# Altium PCB COMMS_TEMP.PcbDoc
Units mil, origin at the board's own origin, x right, y up, seen from the top; angles counter-clockwise.
Board outline 11330 x 5435 mil, 2 copper layers (Top Layer, Bottom Layer); 84 components, 583 nets, 842 pads, 82 vias.
Unrouted connection lines stored in the file: 232.
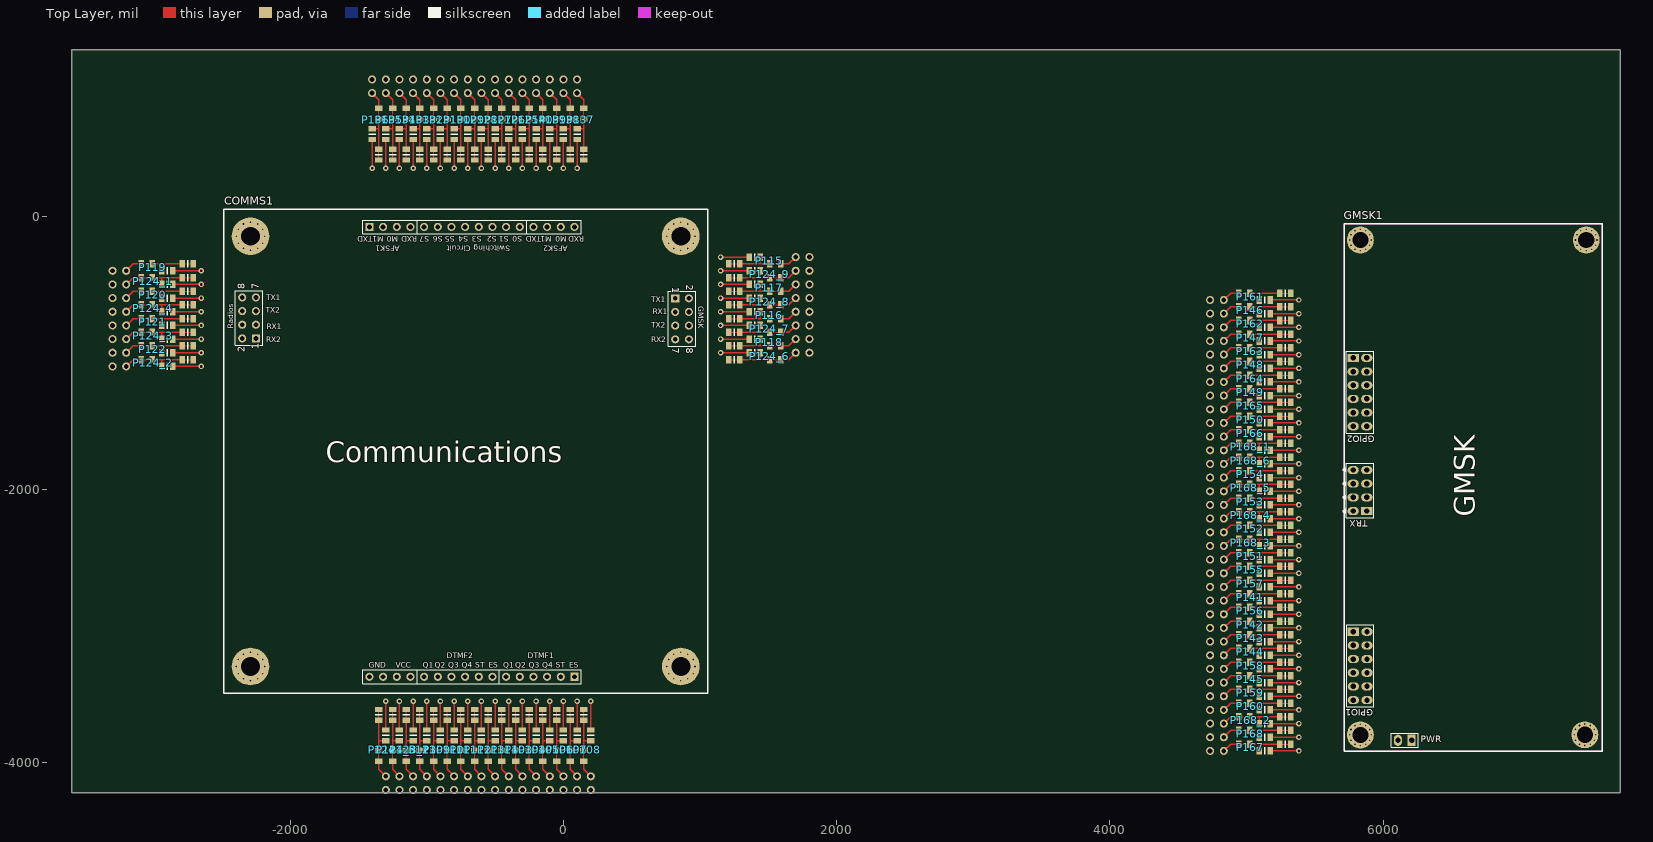
[diagram p0: Top Layer view]
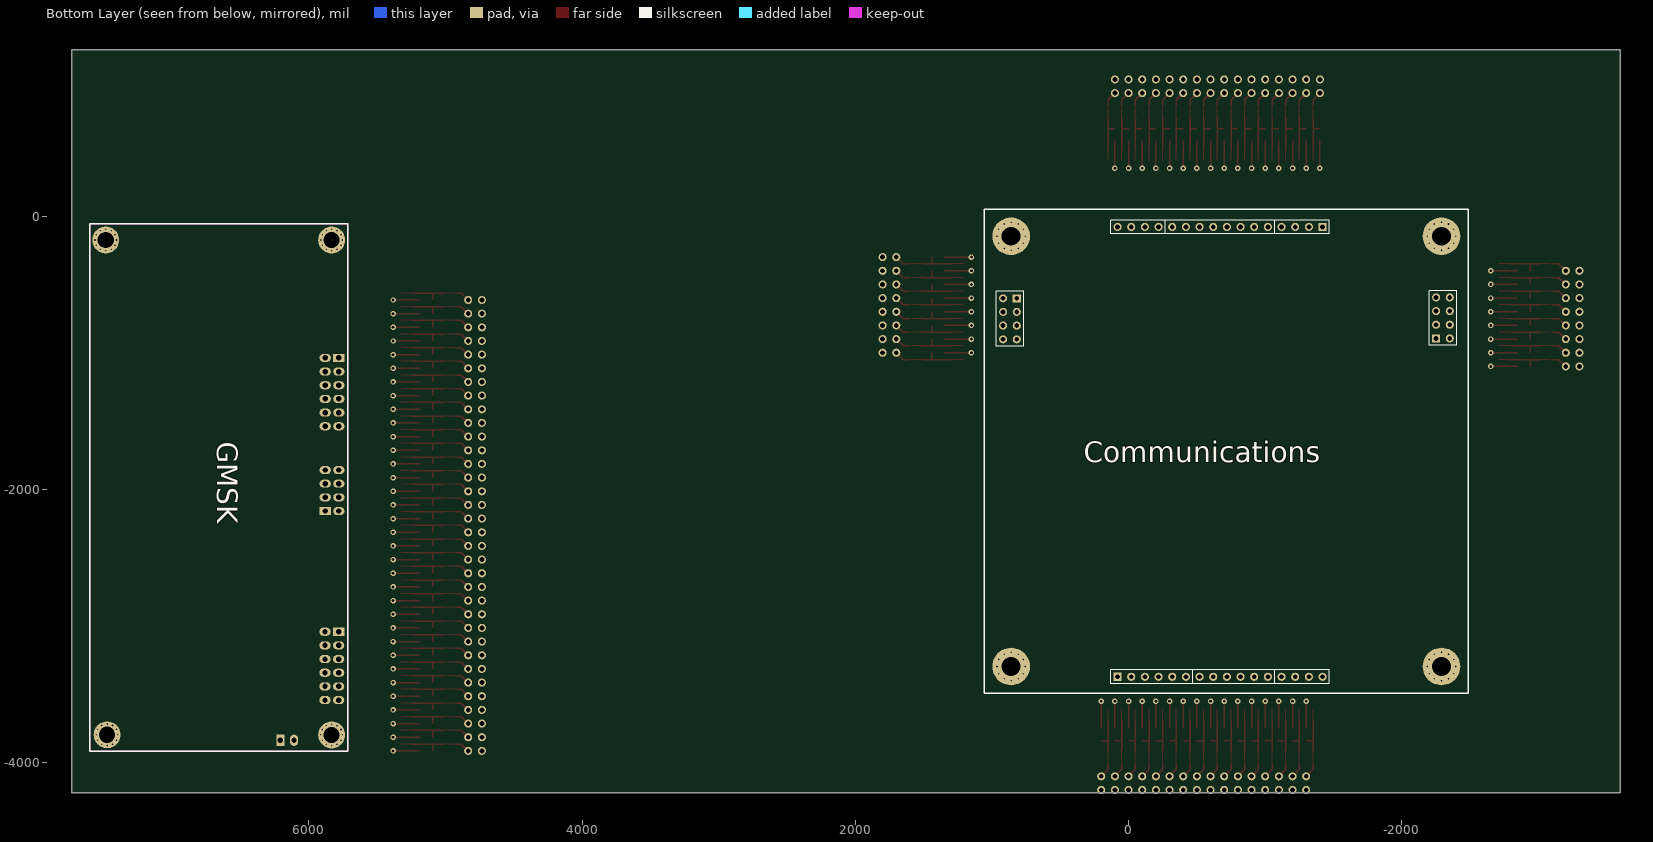
[diagram p1: Bottom Layer view, seen from below]

## Layer stack, top to bottom
Top Layer: signal copper 1.4
Dielectric: dielectric 12.6, FR-4, Dk 4.8
Bottom Layer: signal copper 1.4

## Board outline
-3597,-4219 7733,-4219 7733,1211 7733,1216 -3597,1216

## Design rules (kind name [scope] priority, off if disabled: settings)
Clearance [All] p1: gap=10
PolygonConnect [All] p1: connectstyle=Relief reliefconductorwidth=10 reliefentries=4 polygonreliefangle="90 Angle"
RoutingVias [All] p1: holewidth=28 width=50 viastyle="Through Hole" minholewidth=28 minwidth=50 maxholewidth=28 maxwidth=50
SilkscreenOverComponentPads [All] p1: minsilkscreentomaskgap=10
SolderMaskExpansion [All] p1: expansion=4
Width [All] p1: maxlimit=10 minlimit=10 preferedwidth=10
27 further rules are at their usual default settings.

## Classes and differential pairs
component class PWR_GEN: BCR1 D1 F86 F87 F88 F89 F90 F91 F92 F93 F94 F95 F96 F97 F98 F99 F100 F101 F102 F103 F104 F105 P321 P322 P323 P324 P325 P326 P327 P328 P329 P330 P331 P332 P333 P334 P335 P336 P337 P338 P339 P340 P341 P342 P343 P344 P345 P346 P347 P348 P349 P350 P351 P352 P353 P354 P355
component class CONNECTORS: F49 F50 F51 F52 F53 F54 F55 F56 F57 F58 F59 F60 F61 F62 J1 J2 J3 J4 J5 J6 J7 J8 J9 J10 J11 J12 J13 J14 J15 J16 J17 J18 J19 J20 J21 J22 J23 J24 P169 P170 P171 P172 P173 P174 P175 P176 P177 P178 P179 P180 P181 P182 P183 P184 P185 P186
component class COMMSB: COMMS1 P103 P104 P105 P106 P107 P108 P109 P110 P111 P112 P113 P114 P115 P116 P117 P118 P119 P120 P121 P122 P123 P123_1 P124 P124_1 P124_2 P124_3 P124_4 P124_5 P124_6 P124_7 P124_8 P124_9 P125 P126 P127 P128 P129 P130 P131 P132 P133 P134 P135 P136 P137 P138 P139 P140
component class GMSK: GMSK1 P141 P142 P143 P144 P145 P146 P147 P148 P149 P150 P151 P152 P153 P154 P155 P156 P157 P158 P159 P160 P161 P162 P163 P164 P165 P166 P167 P168 P168_1 P168_2 P168_3 P168_4 P168_5 P168_6

## Components (designator, comment, footprint, x,y, rotation, side; value= is the part's Value field where it differs from the comment)
COMMS1 "COMMS" Communications -2487,-3494 r0 top
GMSK1 "GMSK" GMSK 7633,-3914 r90 top
P103 "Jumper_Filter" Jumper_filter -300,-4200 r90 top
P104 "Jumper_Filter" Jumper_filter -200,-4200 r90 top
P105 "Jumper_Filter" Jumper_filter -100,-4200 r90 top
P106 "Jumper_Filter" Jumper_filter 0,-4200 r90 top
P107 "Jumper_Filter" Jumper_filter 100,-4200 r90 top
P108 "Jumper_Filter" Jumper_filter 200,-4200 r90 top
P109 "Jumper_Filter" Jumper_filter -900,-4200 r90 top
P110 "Jumper_Filter" Jumper_filter -800,-4200 r90 top
P111 "Jumper_Filter" Jumper_filter -700,-4200 r90 top
P112 "Jumper_Filter" Jumper_filter -600,-4200 r90 top
P113 "Jumper_Filter" Jumper_filter -500,-4200 r90 top
P114 "Jumper_Filter" Jumper_filter -400,-4200 r90 top
P115 "Jumper_Filter" Jumper_filter 1800,-300 r180 top
P116 "Jumper_Filter" Jumper_filter 1800,-700 r180 top
P117 "Jumper_Filter" Jumper_filter 1800,-500 r180 top
P118 "Jumper_Filter" Jumper_filter 1800,-900 r180 top
P119 "Jumper_Filter" Jumper_filter -3300,-400 r0 top
P120 "Jumper_Filter" Jumper_filter -3300,-600 r0 top
P121 "Jumper_Filter" Jumper_filter -3300,-800 r0 top
P122 "Jumper_Filter" Jumper_filter -3300,-1000 r0 top
P123 "Jumper_Filter" Jumper_filter -1000,-4200 r90 top
P123_1 "Jumper_Filter" Jumper_filter -1100,-4200 r90 top
P124 "Jumper_Filter" Jumper_filter -1300,-4200 r90 top
P124_1 "Jumper_Filter" Jumper_filter -3300,-500 r0 top
P124_2 "Jumper_Filter" Jumper_filter -3300,-1100 r0 top
P124_3 "Jumper_Filter" Jumper_filter -3300,-900 r0 top
P124_4 "Jumper_Filter" Jumper_filter -3300,-700 r0 top
P124_5 "Jumper_Filter" Jumper_filter -1200,-4200 r90 top
P124_6 "Jumper_Filter" Jumper_filter 1800,-1000 r180 top
P124_7 "Jumper_Filter" Jumper_filter 1800,-800 r180 top
P124_8 "Jumper_Filter" Jumper_filter 1800,-600 r180 top
P124_9 "Jumper_Filter" Jumper_filter 1800,-400 r180 top
P125 "Jumper_Filter" Jumper_filter -300,1000 r270 top
P126 "Jumper_Filter" Jumper_filter -400,1000 r270 top
P127 "Jumper_Filter" Jumper_filter -500,1000 r270 top
P128 "Jumper_Filter" Jumper_filter -600,1000 r270 top
P129 "Jumper_Filter" Jumper_filter -700,1000 r270 top
P130 "Jumper_Filter" Jumper_filter -800,1000 r270 top
P131 "Jumper_Filter" Jumper_filter -900,1000 r270 top
P132 "Jumper_Filter" Jumper_filter -1000,1000 r270 top
P133 "Jumper_Filter" Jumper_filter -1100,1000 r270 top
P134 "Jumper_Filter" Jumper_filter -1200,1000 r270 top
P135 "Jumper_Filter" Jumper_filter -1300,1000 r270 top
P136 "Jumper_Filter" Jumper_filter -1400,1000 r270 top
P137 "Jumper_Filter" Jumper_filter 100,1000 r270 top
P138 "Jumper_Filter" Jumper_filter 0,1000 r270 top
P139 "Jumper_Filter" Jumper_filter -100,1000 r270 top
P140 "Jumper_Filter" Jumper_filter -200,1000 r270 top
P141 "Jumper_Filter" Jumper_filter 4733,-2814 r0 top
P142 "Jumper_Filter" Jumper_filter 4733,-3014 r0 top
P143 "Jumper_Filter" Jumper_filter 4733,-3114 r0 top
P144 "Jumper_Filter" Jumper_filter 4733,-3214 r0 top
P145 "Jumper_Filter" Jumper_filter 4733,-3414 r0 top
P146 "Jumper_Filter" Jumper_filter 4733,-714 r0 top
P147 "Jumper_Filter" Jumper_filter 4733,-914 r0 top
P148 "Jumper_Filter" Jumper_filter 4733,-1114 r0 top
P149 "Jumper_Filter" Jumper_filter 4733,-1314 r0 top
P150 "Jumper_Filter" Jumper_filter 4733,-1514 r0 top
P151 "Jumper_Filter" Jumper_filter 4733,-2514 r0 top
P152 "Jumper_Filter" Jumper_filter 4733,-2314 r0 top
P153 "Jumper_Filter" Jumper_filter 4733,-2114 r0 top
P154 "Jumper_Filter" Jumper_filter 4733,-1914 r0 top
P155 "Jumper_Filter" Jumper_filter 4733,-2614 r0 top
P156 "Jumper_Filter" Jumper_filter 4733,-2914 r0 top
P157 "Jumper_Filter" Jumper_filter 4733,-2714 r0 top
P158 "Jumper_Filter" Jumper_filter 4733,-3314 r0 top
P159 "Jumper_Filter" Jumper_filter 4733,-3514 r0 top
P160 "Jumper_Filter" Jumper_filter 4733,-3614 r0 top
P161 "Jumper_Filter" Jumper_filter 4733,-614 r0 top
P162 "Jumper_Filter" Jumper_filter 4733,-814 r0 top
P163 "Jumper_Filter" Jumper_filter 4733,-1014 r0 top
P164 "Jumper_Filter" Jumper_filter 4733,-1214 r0 top
P165 "Jumper_Filter" Jumper_filter 4733,-1414 r0 top
P166 "Jumper_Filter" Jumper_filter 4733,-1614 r0 top
P167 "Jumper_Filter" Jumper_filter 4733,-3914 r0 top
P168 "Jumper_Filter" Jumper_filter 4733,-3814 r0 top
P168_1 "Jumper_Filter" Jumper_filter 4733,-1714 r0 top
P168_2 "Jumper_Filter" Jumper_filter 4733,-3714 r0 top
P168_3 "Jumper_Filter" Jumper_filter 4733,-2414 r0 top
P168_4 "Jumper_Filter" Jumper_filter 4733,-2214 r0 top
P168_5 "Jumper_Filter" Jumper_filter 4733,-2014 r0 top
P168_6 "Jumper_Filter" Jumper_filter 4733,-1814 r0 top

## Footprints (in the part's own frame and the unit in brackets; to place one, negate y for a bottom-side part, rotate by r counter-clockwise, add the part's x,y. Pads: shape width x height; smd on the part's side, far side on the other; paste and mask are expansions set on the pad)
Communications [mm] "Communications"
  round 1.5 hole 0.9: AFSK1_M0(32.192,86.733) AFSK1_M1(29.652,86.733) AFSK1_RXD(34.732,86.733) AFSK2_M0(62.672,86.733) AFSK2_M1(60.132,86.733) AFSK2_RXD(65.212,86.733) AFSK2_TXD(57.592,86.733) DTMF1_Q1(52.512,3.113) DTMF1_Q2(55.052,3.113) DTMF1_Q3(57.592,3.113) DTMF1_Q4(60.132,3.113) DTMF1_ST(62.672,3.113) DTMF2_ES(49.972,3.113) DTMF2_Q1(37.272,3.113) DTMF2_Q2(39.812,3.113) DTMF2_Q3(42.352,3.113) DTMF2_Q4(44.892,3.113) DTMF2_ST(47.432,3.113) GMSK_RX1(83.952,70.923) GMSK_RX2(83.952,65.843) GMSK_TX2(83.952,68.383) GND(3.462,66.013) GND(3.462,68.553) GND(3.462,71.093) GND(3.462,73.633) GND(27.112,3.113) GND(29.652,3.113) GND(86.492,65.843) GND(86.492,68.383) GND(86.492,70.923) GND(86.492,73.463) RX1(6.002,68.553) S0(55.052,86.733) S1(52.512,86.733) S2(49.972,86.733) S3(47.432,86.733) S4(44.892,86.733) S5(42.352,86.733) S6(39.812,86.733) S7(37.272,86.733) TX1(6.002,73.633) TX2(6.002,71.093) VCC(32.192,3.113) VCC(34.732,3.113)
  rect 1.5x1.5 hole 0.9: AFSK1_TXD(27.112,86.733) DTMF1_ES(65.212,3.113) GMSK_TX1(83.952,73.463) RX2(6.002,66.013)
  round 1 hole 0.3: ""(2.377,5.013) ""(2.377,85.013) ""(2.729,3.701) ""(2.729,6.325) ""(2.729,83.701) ""(2.729,86.325) ""(3.69,7.286) ""(3.69,87.286) ""(3.69,2.74) ""(3.69,82.74) ""(5.002,2.388) ""(5.002,7.638) ""(5.002,82.388) ""(5.002,87.638) ""(6.314,2.74) ""(6.314,7.286) ""(6.314,82.74) ""(6.314,87.286) ""(7.275,3.701) ""(7.275,83.701) ""(7.275,6.325) ""(7.275,86.325) ""(7.627,5.013) ""(7.627,85.013) ""(82.375,85) ""(82.377,5.013) ""(82.727,83.688) ""(82.727,86.312) ""(82.729,3.701) ""(82.729,6.325) ""(83.688,87.273) ""(83.688,82.727) ""(83.69,7.286) ""(83.69,2.74) ""(85,82.375) ""(85,87.625) ""(85.002,2.388) ""(85.002,7.638) ""(86.312,82.727) ""(86.312,87.273) ""(86.314,2.74) ""(86.314,7.286) ""(87.273,83.688) ""(87.273,86.312) ""(87.275,3.701) ""(87.275,6.325) ""(87.625,85) ""(87.627,5.013)
  round 7 hole 3.5: ""(5.002,5.013) ""(5.002,85.013) ""(85,85) ""(85.002,5.013)
  silkscreen extent 0,0.01 90,90.01
GMSK [mm] "Foot print of GMSK for the flatsat board"
  rect 1.5x2.1 hole 1: 1A(22.15,47.03) 1B(73.05,47.08) 1C(44.59,44.54)
  oval 1.5x2.1 hole 1: 2A(22.15,44.49) 2B(73.05,44.54) 3A(19.61,47.03) 3B(70.51,47.08) 3C(47.13,44.54) 4A(19.61,44.49) 4B(70.51,44.54) 5A(17.07,47.03) 5B(67.97,47.08) 5C(49.67,44.54) 6A(17.07,44.49) 6B(67.97,44.54) 7A(14.53,47.03) 7B(65.43,47.08) 7C(52.21,44.54) 8A(14.53,44.49) 8B(65.43,44.54) 8C(9.45,47.03) 8C(44.59,47.08) 8C(47.13,47.08) 8C(49.67,47.08) 8C(52.21,47.08) 8C(60.35,47.08) 9A(11.99,47.03) 9B(62.89,47.08) 10A(11.99,44.49) 10B(62.89,44.54) 12A(9.45,44.49) 12B(60.35,44.54)
  oval 2.1x1.5 hole 1: 2C(1.97,38.74)
  rect 2.1x1.5 hole 1: 8C(1.97,36.2)
  round 1 hole 0.3: ""(0.97,45.74) ""(1,4) ""(1.238,46.74) ""(1.238,44.74) ""(1.268,5) ""(1.268,3) ""(1.97,47.472) ""(1.97,44.008) ""(2,5.732) ""(2,2.268) ""(2.97,47.74) ""(2.97,43.74) ""(3,6) ""(3,2) ""(3.97,44.008) ""(3.97,47.472) ""(4,2.268) ""(4,5.732) ""(4.702,44.74) ""(4.702,46.74) ""(4.732,3) ""(4.732,5) ""(4.97,45.74) ""(5,4) ""(92.97,3.74) ""(92.97,45.74) ""(93.238,2.74) ""(93.238,4.74) ""(93.238,44.74) ""(93.238,46.74) ""(93.97,2.008) ""(93.97,5.472) ""(93.97,44.008) ""(93.97,47.472) ""(94.97,1.74) ""(94.97,5.74) ""(94.97,43.74) ""(94.97,47.74) ""(95.97,2.008) ""(95.97,5.472) ""(95.97,44.008) ""(95.97,47.472) ""(96.702,2.74) ""(96.702,4.74) ""(96.702,44.74) ""(96.702,46.74) ""(96.97,3.74) ""(96.97,45.74)
  round 5 hole 3: ""(2.97,45.74) ""(3,4) ""(94.97,3.74) ""(94.97,45.74)
  Keep-Out Layer lines w0.254: -0.03,48.74 97.97,48.74 97.97,0.74 -0.03,0.74 -0.03,48.74
  silkscreen extent -0.03,0.74 97.97,48.94, body extent 0.8,35.03 74.23,48.26, height 7.01
Jumper_filter [mm] "Connector; Header; 2 Position"
  round 1.5 hole 0.9: 1(0,0) 2(2.54,0)
  rect 1x1.4 smd: 2(5.35,1.27) 2(7.35,1.27) 2(9.16,0) 2(12.97,1.27) 2(14.97,1.27) 3(11.16,0)
  Top Layer lines w0.152: 5.334,1.27 14.986,1.27 ; 7.366,1.27 7.366,1.016
  Top Layer lines w0.254: 5.08,1.27 3.81,1.27 2.54,0 ; 7.366,1.27 12.954,1.27 ; 9.144,1.27 9.144,0 ; 11.43,0 16.51,0
  silkscreen extent 10.16,-0.65 13.97,1.92, body extent 5.25,-0.65 15.07,1.92, height 0.5

## Via types
v1: diameter 40, hole 20, Top Layer to Bottom Layer, 82 vias

## Nets (pads, with @x,y where several pads share a name; then routed paths per layer and width w, separated by ;. In a path a pad name is that pad's centre, name@x,y a point inside that pad or via, vN(x,y) a via of type N, cw(c..) or ccw(c..) an arc to the next point about the centre after c; other vN are vias at no path point)
3V3_AUX: 
3V3_AUX_E\N\: 
3V3_BBONE: 
3V3_COMMS: P123.1 P123_1.1 P167.1
3V3_CSC: 
3V3_PWR: 
3V3_UNREG: 
5V0_AUX: 
5V0_AUX_E\N\: 
5V0_BBONE: 
5V0_BCR: 
5V0_TELEM: 
5V0_UNREG: 
8V0_RX1: 
8V0_RX2: 
AFSK1_DET: P108.1
AFSK1_M0: P134.1
AFSK1_M1: P135.1
AFSK1_RX: 
AFSK1_RXD: P133.1
AFSK1_TX: 
AFSK1_TXD: P136.1
AFSK2_DET: P114.1
AFSK2_M0: P138.1
AFSK2_M1: P139.1
AFSK2_RX: 
AFSK2_RXD: P137.1
AFSK2_TX: 
AFSK2_TXD: P140.1
BBONE_E\N\: 
BBONE_I2C2_SCL: 
BBONE_I2C2_SDA: 
BCR_E\N\: 
BCR_MISO: 
BCR_MOSI: 
BCR_R\S\T\: 
BCR_SCK: 
COMMS_E\N\: 
CSC_E\N\: 
CSC_ISP: 
CSC_RST: 
DTMF1Q1: P103.1
DTMF1Q2: P104.1
DTMF1Q3: P105.1
DTMF1Q4: P106.1
DTMF1ST: P107.1
DTMF2Q1: P109.1
DTMF2Q2: P110.1
DTMF2Q3: P111.1
DTMF2Q4: P112.1
DTMF2ST: P113.1
GND: P103.3 P104.3 P105.3 P106.3 P107.3 P108.3 P109.3 P110.3 P111.3 P112.3 P113.3 P114.3 P115.3 P116.3 P117.3 P118.3 P119.3 P120.3 P121.3 P122.3 P123.3 P123_1.3 P124.1 P124.3 P124_1.1 P124_1.3 P124_2.1 P124_2.3 P124_3.1 P124_3.3 P124_4.1 P124_4.3 P124_5.1 P124_5.3 P124_6.1 P124_6.3 P124_7.1 P124_7.3 P124_8.1 P124_8.3 P124_9.1 P124_9.3 P125.3 P126.3 P127.3 P128.3 P129.3 P130.3 P131.3 P132.3 P133.3 P134.3 P135.3 P136.3 P137.3 P138.3 P139.3 P140.3 P141.3 P142.3 P143.3 P144.3 P145.3 P146.3 P147.3 P148.3 P149.3 P150.3 P151.3 P152.3 P153.3 P154.3 P155.3 P156.3 P157.3 P158.3 P159.3 P160.3 P161.3 P162.3 P163.3 P164.3 P165.3 P166.3 P167.3 P168.1 P168.3 P168_1.1 P168_1.3 P168_2.1 P168_2.3 P168_3.1 P168_3.3 P168_4.1 P168_4.3 P168_5.1 P168_5.3 P168_6.1 P168_6.3
  other v1: 5383,-3914 5383,-3814 5383,-3714 5383,-3614 -1300,-3550 -1200,-3550 -1100,-3550 -1000,-3550 -900,-3550 -800,-3550 -700,-3550 -600,-3550 -500,-3550 -400,-3550 -300,-3550 -200,-3550 -100,-3550 0,-3550 100,-3550 200,-3550 5383,-3514 5383,-3414 5383,-3314 5383,-2914 5383,-2714 5383,-2614 5383,-2514 5383,-2414 5383,-2314 5383,-2214 5383,-2114 5383,-2014 5383,-1914 5383,-1814 5383,-1714 5383,-1614 5383,-1414 5383,-1214 -2650,-1100 5383,-1014 -2650,-1000 1150,-1000 5383,-914 -2650,-900 1150,-900 5383,-814 -2650,-800 1150,-800 5383,-714 -2650,-700 1150,-700 5383,-614 -2650,-600 1150,-600 -2650,-500 1150,-500 -2650,-400 1150,-400 1150,-300 -1400,350 -1300,350 -1200,350 -1100,350 -1000,350 -900,350 -800,350 -700,350 -600,350 -500,350 -400,350 -300,350 -200,350 -100,350 0,350 100,350
I2C0_SCL: 
I2C0_SDA: 
I2C1_SCL: 
I2C1_SDA: 
I2C2_SCL: 
I2C2_SCL_5V: 
I2C2_SDA: 
I2C2_SDA_5V: 
NetBBONE1_A01: 
NetBBONE1_A02: 
NetBBONE1_A03: 
NetBBONE1_A04: 
NetBBONE1_A05: 
NetBBONE1_A06: 
NetBBONE1_A07: 
NetBBONE1_A08: 
NetBBONE1_A09: 
NetBBONE1_A10: 
NetBBONE1_A11: 
NetBBONE1_A12: 
NetBBONE1_A13: 
NetBBONE1_A14: 
NetBBONE1_A15: 
NetBBONE1_A16: 
NetBBONE1_A17: 
NetBBONE1_A18: 
NetBBONE1_A19: 
NetBBONE1_A20: 
NetBBONE1_A21: 
NetBBONE1_A22: 
NetBBONE1_A23: 
NetBBONE1_A24: 
NetBBONE1_A25: 
NetBBONE1_A26: 
NetBBONE1_A27: 
NetBBONE1_A28: 
NetBBONE1_A29: 
NetBBONE1_A30: 
NetBBONE1_A31: 
NetBBONE1_A32: 
NetBBONE1_A33: 
NetBBONE1_A34: 
NetBBONE1_A35: 
NetBBONE1_A36: 
NetBBONE1_A37: 
NetBBONE1_A38: 
NetBBONE1_A39: 
NetBBONE1_A40: 
NetBBONE1_A41: 
NetBBONE1_A42: 
NetBBONE1_A43: 
NetBBONE1_A44: 
NetBBONE1_A45: 
NetBBONE1_A46: 
NetBBONE1_B01: 
NetBBONE1_B02: 
NetBBONE1_B03: 
NetBBONE1_B04: 
NetBBONE1_B05: 
NetBBONE1_B06: 
NetBBONE1_B07: 
NetBBONE1_B08: 
NetBBONE1_B09: 
NetBBONE1_B10: 
NetBBONE1_B11: 
NetBBONE1_B12: 
NetBBONE1_B13: 
NetBBONE1_B14: 
NetBBONE1_B15: 
NetBBONE1_B16: 
NetBBONE1_B17: 
NetBBONE1_B18: 
NetBBONE1_B19: 
NetBBONE1_B20: 
NetBBONE1_B21: 
NetBBONE1_B22: 
NetBBONE1_B23: 
NetBBONE1_B24: 
NetBBONE1_B25: 
NetBBONE1_B26: 
NetBBONE1_B27: 
NetBBONE1_B28: 
NetBBONE1_B29: 
NetBBONE1_B30: 
NetBBONE1_B31: 
NetBBONE1_B32: 
NetBBONE1_B33: 
NetBBONE1_B34: 
NetBBONE1_B35: 
NetBBONE1_B36: 
NetBBONE1_B37: 
NetBBONE1_B38: 
NetBBONE1_B39: 
NetBBONE1_B40: 
NetBBONE1_B41: 
NetBBONE1_B42: 
NetBBONE1_B43: 
NetBBONE1_B44: 
NetBBONE1_B45: 
NetBBONE1_B46: 
NetBBONE1_P01: 
NetBBONE1_P02: 
NetBBONE1_P03: 
NetBBONE1_P04: 
NetBBONE1_P05: 
NetBBONE1_P06: 
NetBBONE1_P07: 
NetBBONE1_P08: 
NetBBONE1_P09: 
NetBBONE1_P10: 
NetBCR1_1: 
NetBCR1_2: 
NetBCR1_3: 
NetBCR1_4: 
NetBCR1_5: 
NetBCR1_6: 
NetBCR1_7: 
NetBCR1_8: 
NetBCR1_9: 
NetBCR1_10: 
NetBCR1_11: 
NetBCR1_12: 
NetBCR1_13: 
NetBCR1_14: 
NetBCR1_15: 
NetBCR1_16: 
NetBCR1_17: 
NetBCR1_18: 
NetBCR1_19: 
NetBCR1_20: 
NetBCR1_21: 
NetBCR1_22: 
NetBCR1_23: 
NetBCR1_24: 
NetBCR1_25: 
NetBCR1_26: 
NetBCR1_27: 
NetBCR1_28: 
NetBCR1_29: 
NetBCR1_30: 
NetBCR1_31: 
NetBCR1_32: 
NetBCR1_33: 
NetBCR1_34: 
NetBCR1_35: 
NetC1_2: 
NetCOMMS1_AFSK1_M0: COMMS1.AFSK1_M0 P134.2
NetCOMMS1_AFSK1_M1: COMMS1.AFSK1_M1 P135.2
NetCOMMS1_AFSK1_RXD: COMMS1.AFSK1_RXD P133.2
NetCOMMS1_AFSK1_TXD: COMMS1.AFSK1_TXD P136.2
NetCOMMS1_AFSK2_M0: COMMS1.AFSK2_M0 P138.2
NetCOMMS1_AFSK2_M1: COMMS1.AFSK2_M1 P139.2
NetCOMMS1_AFSK2_RXD: COMMS1.AFSK2_RXD P137.2
NetCOMMS1_AFSK2_TXD: COMMS1.AFSK2_TXD P140.2
NetCOMMS1_DTMF1_ES: COMMS1.DTMF1_ES P108.2
NetCOMMS1_DTMF1_Q1: COMMS1.DTMF1_Q1 P103.2
NetCOMMS1_DTMF1_Q2: COMMS1.DTMF1_Q2 P104.2
NetCOMMS1_DTMF1_Q3: COMMS1.DTMF1_Q3 P105.2
NetCOMMS1_DTMF1_Q4: COMMS1.DTMF1_Q4 P106.2
NetCOMMS1_DTMF1_ST: COMMS1.DTMF1_ST P107.2
NetCOMMS1_DTMF2_ES: COMMS1.DTMF2_ES P114.2
NetCOMMS1_DTMF2_Q1: COMMS1.DTMF2_Q1 P109.2
NetCOMMS1_DTMF2_Q2: COMMS1.DTMF2_Q2 P110.2
NetCOMMS1_DTMF2_Q3: COMMS1.DTMF2_Q3 P111.2
NetCOMMS1_DTMF2_Q4: COMMS1.DTMF2_Q4 P112.2
NetCOMMS1_DTMF2_ST: COMMS1.DTMF2_ST P113.2
NetCOMMS1_GMSK_RX1: COMMS1.GMSK_RX1 P117.2
NetCOMMS1_GMSK_RX2: COMMS1.GMSK_RX2 P118.2
NetCOMMS1_GMSK_TX1: COMMS1.GMSK_TX1 P115.2
NetCOMMS1_GMSK_TX2: COMMS1.GMSK_TX2 P116.2
NetCOMMS1_GND: COMMS1.GND P124.2 P124_1.2 P124_2.2 P124_3.2 P124_4.2 P124_5.2 P124_6.2 P124_7.2 P124_8.2 P124_9.2
NetCOMMS1_RX1: COMMS1.RX1 P121.2
NetCOMMS1_RX2: COMMS1.RX2 P122.2
NetCOMMS1_S0: COMMS1.S0 P125.2
NetCOMMS1_S1: COMMS1.S1 P126.2
NetCOMMS1_S2: COMMS1.S2 P127.2
NetCOMMS1_S3: COMMS1.S3 P128.2
NetCOMMS1_S4: COMMS1.S4 P129.2
NetCOMMS1_S5: COMMS1.S5 P130.2
NetCOMMS1_S6: COMMS1.S6 P131.2
NetCOMMS1_S7: COMMS1.S7 P132.2
NetCOMMS1_TX1: COMMS1.TX1 P119.2
NetCOMMS1_TX2: COMMS1.TX2 P120.2
NetCOMMS1_VCC: COMMS1.VCC P123.2@-1000,-4100 P123_1.2
NetCSC1_C1_1: 
NetCSC1_C1_2: 
NetCSC1_C1_3: 
NetCSC1_C1_4: 
NetCSC1_C1_5: 
NetCSC1_C1_6: 
NetCSC1_C1_7: 
NetCSC1_C1_8: 
NetCSC1_C1_9: 
NetCSC1_C1_10: 
NetCSC1_C1_11: 
NetCSC1_C1_12: 
NetCSC1_C1_13: 
NetCSC1_C1_14: 
NetCSC1_C1_15: 
NetCSC1_C1_16: 
NetCSC1_C1_17: 
NetCSC1_C1_18: 
NetCSC1_C1_19: 
NetCSC1_C1_20: 
NetCSC1_C1_21: 
NetCSC1_C1_22: 
NetCSC1_C1_23: 
NetCSC1_C1_24: 
NetCSC1_C1_25: 
NetCSC1_C1_26: 
NetCSC1_C1_27: 
NetCSC1_C1_28: 
NetCSC1_C1_29: 
NetCSC1_C1_30: 
NetCSC1_C1_31: 
NetCSC1_C1_32: 
NetCSC1_C1_33: 
NetCSC1_C1_34: 
NetCSC1_C1_35: 
NetCSC1_C1_36: 
NetCSC1_C1_37: 
NetCSC1_C1_38: 
NetCSC1_C1_39: 
NetCSC1_C2_2: 
NetCSC1_C2_3: 
NetCSC1_C2_4: 
NetCSC1_C2_5: 
NetCSC1_C2_6: 
NetCSC1_C2_7: 
NetCSC1_C2_8: 
NetCSC1_C2_9: 
NetCSC1_C2_10: 
NetCSC1_C2_11: 
NetCSC1_C2_12: 
NetCSC1_C2_13: 
NetCSC1_C2_14: 
NetCSC1_C2_15: 
NetCSC1_C2_16: 
NetCSC1_C2_17: 
NetCSC1_C2_18: 
NetCSC1_C2_19: 
NetCSC1_C2_20: 
NetCSC1_C2_21: 
NetCSC1_C2_22: 
NetCSC1_C2_23: 
NetCSC1_C2_24: 
NetCSC1_C2_25: 
NetCSC1_C2_26: 
NetCSC1_C2_27: 
NetCSC1_C2_28: 
NetCSC1_C2_29: 
NetCSC1_C2_30: 
NetCSC1_C2_31: 
NetCSC1_C2_32: 
NetCSC1_C2_33: 
NetCSC1_C2_34: 
NetCSC1_C2_35: 
NetCSC1_C2_36: 
NetCSC1_C2_37: 
NetCSC1_C2_38: 
NetCSC1_C2_39: 
NetCSC1_C2_40: 
NetCSC1_C3_1: 
NetCSC1_C3_2: 
NetCSC1_C3_3: 
NetCSC1_C3_4: 
NetCSC1_C3_5: 
NetCSC1_C3_6: 
NetCSC1_C3_7: 
NetCSC1_C3_8: 
NetCSC1_C3_9: 
NetCSC1_C3_10: 
NetCSC1_C3_11: 
NetCSC1_C3_12: 
NetCSC1_C3_13: 
NetCSC1_C3_14: 
NetCSC1_C3_15: 
NetCSC1_C3_16: 
NetCSC1_C3_17: 
NetCSC1_C3_18: 
NetCSC1_C3_19: 
NetCSC1_C3_20: 
NetCSC1_C3_21: 
NetCSC1_C3_22: 
NetCSC1_C3_23: 
NetCSC1_C3_24: 
NetCSC1_C3_25: 
NetCSC1_C3_26: 
NetCSC1_C3_27: 
NetCSC1_C3_28: 
NetCSC1_C3_29: 
NetCSC1_C3_30: 
NetCSC1_C3_31: 
NetCSC1_C3_32: 
NetCSC1_C3_33: 
NetCSC1_C3_34: 
NetCSC1_C3_35: 
NetCSC1_C3_36: 
NetCSC1_C3_37: 
NetCSC1_C3_38: 
NetCSC1_C3_39: 
NetCSC1_C3_40: 
NetCSC1_ISP1: 
NetCSC1_ISP2: 
NetCSC1_ISP3: 
NetCSC1_ISP4: 
NetCSC1_ISP5: 
NetCSC1_ISP6: 
NetD1_1: 
NetF50_2: 
NetF51_2: 
NetF52_2: 
NetF53_2: 
NetF54_2: 
NetF55_2: 
NetF56_2: 
NetF57_2: 
NetF58_2: 
NetF59_1: 
NetF60_1: 
NetF61_2: 
NetF62_2: 
NetF86_1: 
NetF87_1: 
NetF88_1: 
NetF89_1: 
NetF91_1: 
NetF92_1: 
NetF93_1: 
NetF94_1: 
NetF95_1: 
NetF96_1: 
NetF97_1: 
NetF98_1: 
NetF99_2: 
NetF100_1: 
NetF101_1: 
NetF102_1: 
NetF103_1: 
NetF104_1: 
NetF105_1: 
NetF106_1: 
NetF106_2: 
NetF107_1: 
NetF107_2: 
NetF108_1: 
NetF108_2: 
NetF109_1: 
NetF109_2: 
NetF110_1: 
NetF110_2: 
NetF111_1: 
NetF111_2: 
NetF112_1: 
NetF112_2: 
NetF113_1: 
NetF113_2: 
NetF114_1: 
NetF114_2: 
NetF115_1: 
NetF115_2: 
NetF116_1: 
NetF116_2: 
NetF117_1: 
NetF117_2: 
NetF118_1: 
NetF118_2: 
NetF119_1: 
NetF119_2: 
NetF120_1: 
NetF120_2: 
NetF121_1: 
NetF121_2: 
NetF122_1: 
NetF122_2: 
NetF123_1: 
NetF123_2: 
NetF124_1: 
NetF124_2: 
NetF125_1: 
NetF125_2: 
NetF126_1: 
NetF126_2: 
NetF127_1: 
NetF127_2: 
NetGMSK1_1A: GMSK1.1A P141.2
NetGMSK1_1B: GMSK1.1B P146.2
NetGMSK1_1C: GMSK1.1C P151.2@4833,-2514
NetGMSK1_2A: GMSK1.2A P155.2
NetGMSK1_2B: GMSK1.2B P161.2
NetGMSK1_2C: GMSK1.2C P167.2
NetGMSK1_3A: GMSK1.3A P142.2@4833,-3014
NetGMSK1_3B: GMSK1.3B P147.2@4833,-914
NetGMSK1_3C: GMSK1.3C P152.2
NetGMSK1_4A: GMSK1.4A P156.2
NetGMSK1_4B: GMSK1.4B P162.2
NetGMSK1_5A: GMSK1.5A P143.2
NetGMSK1_5B: GMSK1.5B P148.2
NetGMSK1_5C: GMSK1.5C P153.2@4833,-2114
NetGMSK1_6A: GMSK1.6A P157.2
NetGMSK1_6B: GMSK1.6B P163.2
NetGMSK1_7A: GMSK1.7A P144.2
NetGMSK1_7B: GMSK1.7B P149.2
NetGMSK1_7C: GMSK1.7C P154.2
NetGMSK1_8A: GMSK1.8A P158.2
NetGMSK1_8B: GMSK1.8B P164.2
NetGMSK1_8C: GMSK1.8C P168.2 P168_1.2 P168_2.2 P168_3.2 P168_4.2 P168_5.2 P168_6.2
NetGMSK1_9A: GMSK1.9A P145.2
NetGMSK1_9B: GMSK1.9B P150.2
NetGMSK1_10A: GMSK1.10A P159.2
NetGMSK1_10B: GMSK1.10B P165.2
NetGMSK1_12A: GMSK1.12A P160.2
NetGMSK1_12B: GMSK1.12B P166.2
NetJ15_1: 
NetJ15_2: 
NetJ15_3: 
NetJ15_4: 
NetJ15_5: 
NetJ15_6: 
NetJ15_7: 
NetJ15_8: 
NetJ15_9: 
NetJ16_1: 
NetJ16_2: 
NetJ16_3: 
NetJ16_4: 
NetJ16_5: 
NetJ16_6: 
NetJ16_7: 
NetJ16_8: 
NetJ16_9: 
NetJ25_2: 
NetJ26_2: 
NetLDO1_EN1: 
NetLDO1_EN2: 
NetLDO1_EN3: 
NetLDO1_EN4: 
NetLDO1_GND: 
NetLDO1_RST1: 
NetLDO1_RST2: 
NetLDO1_RST3: 
NetLDO1_RST4: 
NetLDO2_EN1: 
NetLDO2_EN2: 
NetLDO2_EN3: 
NetLDO2_EN4: 
NetLDO2_GND: 
NetLDO2_RST1: 
NetLDO2_RST2: 
NetLDO2_RST3: 
NetLDO2_RST4: 
NetP275_2: 
NetP276_2: 
NetP297_1: 
NetP298_1: 
NetP299_1: 
NetP300_1: 
NetP358_2: 
NetP359_2: 
NetP362_2: 
NetP363_2: 
NetP365_2: 
NetP366_2: 
NetP368_2: 
NetP369_2: 
NetP372_1: 
NetP375_1: 
NetP377_1: 
NetP378_1: 
NetP380_1: 
NetP381_1: 
NetP?_2: 
PLLACQ1: P160.1
PLLACQ2: P166.1
PWR_E\N\: 
RX1_AF: P121.1
RX1_GMSK: P117.1 P152.1
RX2_AF: P122.1
RX2_GMSK: P118.1 P154.1
RX_PSAVE1: P144.1
RX_PSAVE2: P149.1
RX_S/N1: P157.1
RX_S/N2: P163.1
RXACQ1: P145.1
RXACQ2: P150.1
RXCLK1: P156.1
RXCLK2: P162.1
RXDATA1: P142.1
RXDATA2: P147.1
RXHOLD1: P159.1
RXHOLD2: P165.1
S0: P125.1
S1: P126.1
S2: P127.1
S3: P128.1
S4: P129.1
S5: P130.1
S6: P131.1
S7: P132.1
SOLA_X+_T: 
SOLA_X+_V: 
SOLA_X-_T: 
SOLA_X-_V: 
SOLA_Y+_T: 
SOLA_Y+_V: 
SOLA_Y-_T: 
SOLA_Y-_V: 
SOLA_Z+_T: 
SOLA_Z+_V: 
SOLA_Z-_T: 
SOLA_Z-_V: 
TBATT: 
TELEM_E\N\: 
TX1_AF: P119.1
TX1_GMSK: P115.1 P151.1
TX2_AF: P120.1
TX2_GMSK: P116.1 P153.1
TX_PSAVE1: P158.1
TX_PSAVE2: P164.1
TXCLK1: P155.1
TXCLK2: P161.1
TXDATA1: P141.1
TXDATA2: P146.1
TXEN1: P143.1
TXEN2: P148.1
UART0_RX: 
UART0_TX: 
V_BATT: 
V_LOAD: 
VVAR_TX1: 
VVAR_TX2: 
pads on no net: COMMS1. GMSK1. P123.2@-1000,-3839.37 P123.2@-1050,-3610.63 P123.2@-1050,-3689.37 P123.2@-1050,-3910.63 P123.2@-1050,-3989.37 P142.2@4943.63,-2964 P142.2@5022.37,-2964 P142.2@5093.63,-3014 P142.2@5243.63,-2964 P142.2@5322.37,-2964 P147.2@4943.63,-864 P147.2@5022.37,-864 P147.2@5093.63,-914 P147.2@5243.63,-864 P147.2@5322.37,-864 P151.2@4943.63,-2464 P151.2@5022.37,-2464 P151.2@5093.63,-2514 P151.2@5243.63,-2464 P151.2@5322.37,-2464 P153.2@4943.63,-2064 P153.2@5022.37,-2064 P153.2@5093.63,-2114 P153.2@5243.63,-2064 P153.2@5322.37,-2064
copper on no net:
  other v1: 5383,-3214 5383,-3114 5383,-3014 5383,-2814 5383,-1514 5383,-1314 5383,-1114

## Text inside footprints (layer, text, board x,y; h text height)
COMMS1: Top Overlay "Communications" at -1738.97,-1801.09 h150; Top Overlay "2" at 898.2,-501.74 h50 r270; Top Overlay "1" at 798.2,-521.74 h50 r270; Top Overlay "7" at 798.2,-961.74 h50 r270; Top Overlay "8" at 898.2,-961.74 h50 r270; Top Overlay "2" at -2330.7,-995.06 h50 r90; Top Overlay "1" at -2230.7,-975.06 h50 r90; Top Overlay "7" at -2230.7,-535.06 h50 r90; Top Overlay "8" at -2330.7,-535.06 h50 r90; Top Overlay "Switching Circuit" at -390.46,-215.93 h39.37 r180; Top Overlay "S1" at -400.31,-147.03 h39.37 r180; Top Overlay "S0" at -301.88,-147.03 h39.37 r180; Top Overlay "TXD" at -164.09,-147.03 h39.37 r180; Top Overlay "M0" at 22.92,-147.03 h39.37 r180; Top Overlay "M1" at -85.35,-147.03 h39.37 r180; Top Overlay "RXD" at 150.87,-147.03 h39.37 r180; Top Overlay "AFSK2" at 32.76,-215.93 h39.37 r180; Top Overlay "Q1" at -439.68,-3306.48 h39.37; Top Overlay "DTMF1" at -262.51,-3237.58 h39.37; Top Overlay "Q2" at -351.09,-3306.48 h39.37; Top Overlay "Q3" at -252.67,-3306.48 h39.37; Top Overlay "Q4" at -154.24,-3306.48 h39.37; Top Overlay "ST" at -55.82,-3306.48 h39.37; Top Overlay "ES" at 42.61,-3306.48 h39.37; Top Overlay "ES" at -547.94,-3306.48 h39.37; Top Overlay "ST" at -646.37,-3306.48 h39.37; Top Overlay "Q4" at -744.8,-3306.48 h39.37; Top Overlay "Q3" at -843.22,-3306.48 h39.37; Top Overlay "Q2" at -941.65,-3306.48 h39.37; Top Overlay "DTMF2" at -853.06,-3237.58 h39.37; Top Overlay "Q1" at -1030.23,-3306.48 h39.37; Top Overlay "VCC" at -1227.08,-3306.48 h39.37; Top Overlay "GND" at -1423.93,-3306.48 h39.37; Top Overlay "S7" at -981.02,-147.03 h39.37 r180; Top Overlay "S6" at -882.59,-147.03 h39.37 r180; Top Overlay "S5" at -794.01,-147.03 h39.37 r180; Top Overlay "S4" at -695.58,-147.03 h39.37 r180; Top Overlay "S3" at -597.16,-147.03 h39.37 r180; Top Overlay "S2" at -488.89,-147.03 h39.37 r180; Top Overlay "AFSK1" at -1197.55,-215.93 h39.37 r180; Top Overlay "RXD" at -1069.6,-147.03 h39.37 r180; Top Overlay "M1" at -1315.66,-147.03 h39.37 r180; Top Overlay "M0" at -1207.39,-147.03 h39.37 r180; Top Overlay "TXD" at -1394.4,-147.03 h39.37 r180; Top Overlay "RX2" at 643,-924.59 h39.37; Top Overlay "TX2" at 643,-816.32 h39.37; Top Overlay "RX1" at 652.84,-717.9 h39.37; Top Overlay "TX1" at 643,-629.31 h39.37; Top Overlay "GMSK" at 987.49,-658.84 h39.37 r270; Top Overlay "TX1" at -2175.9,-615.54 h39.37; Top Overlay "TX2" at -2179.83,-706.09 h39.37; Top Overlay "Radios" at -2418.02,-826.17 h39.37 r90; Top Overlay "RX2" at -2175.9,-922.62 h39.37; Top Overlay "RX1" at -2171.96,-828.13 h39.37; Bottom Overlay "Communications" at 327.96,-1801.09 h150
GMSK1: Top Overlay "PWR" at 6272.76,-3850.02 h47.24; Top Overlay "GPIO2" at 5939.1,-1607.9 h47.24 r180; Top Overlay "TRX" at 5884.97,-2226.99 h47.24 r180; Top Overlay "GPIO1" at 5927.29,-3610.85 h47.24 r180